# Altium PCB roneCPUBoard-v12.PcbDoc (part 3 of 3)
Units mil, origin at the board's own origin, x right, y up, seen from the top; angles counter-clockwise.
Board outline 3915.64 x 3915.87 mil, 2 copper layers (Top Layer, Bottom Layer); 205 components, 158 nets, 752 pads, 409 vias.
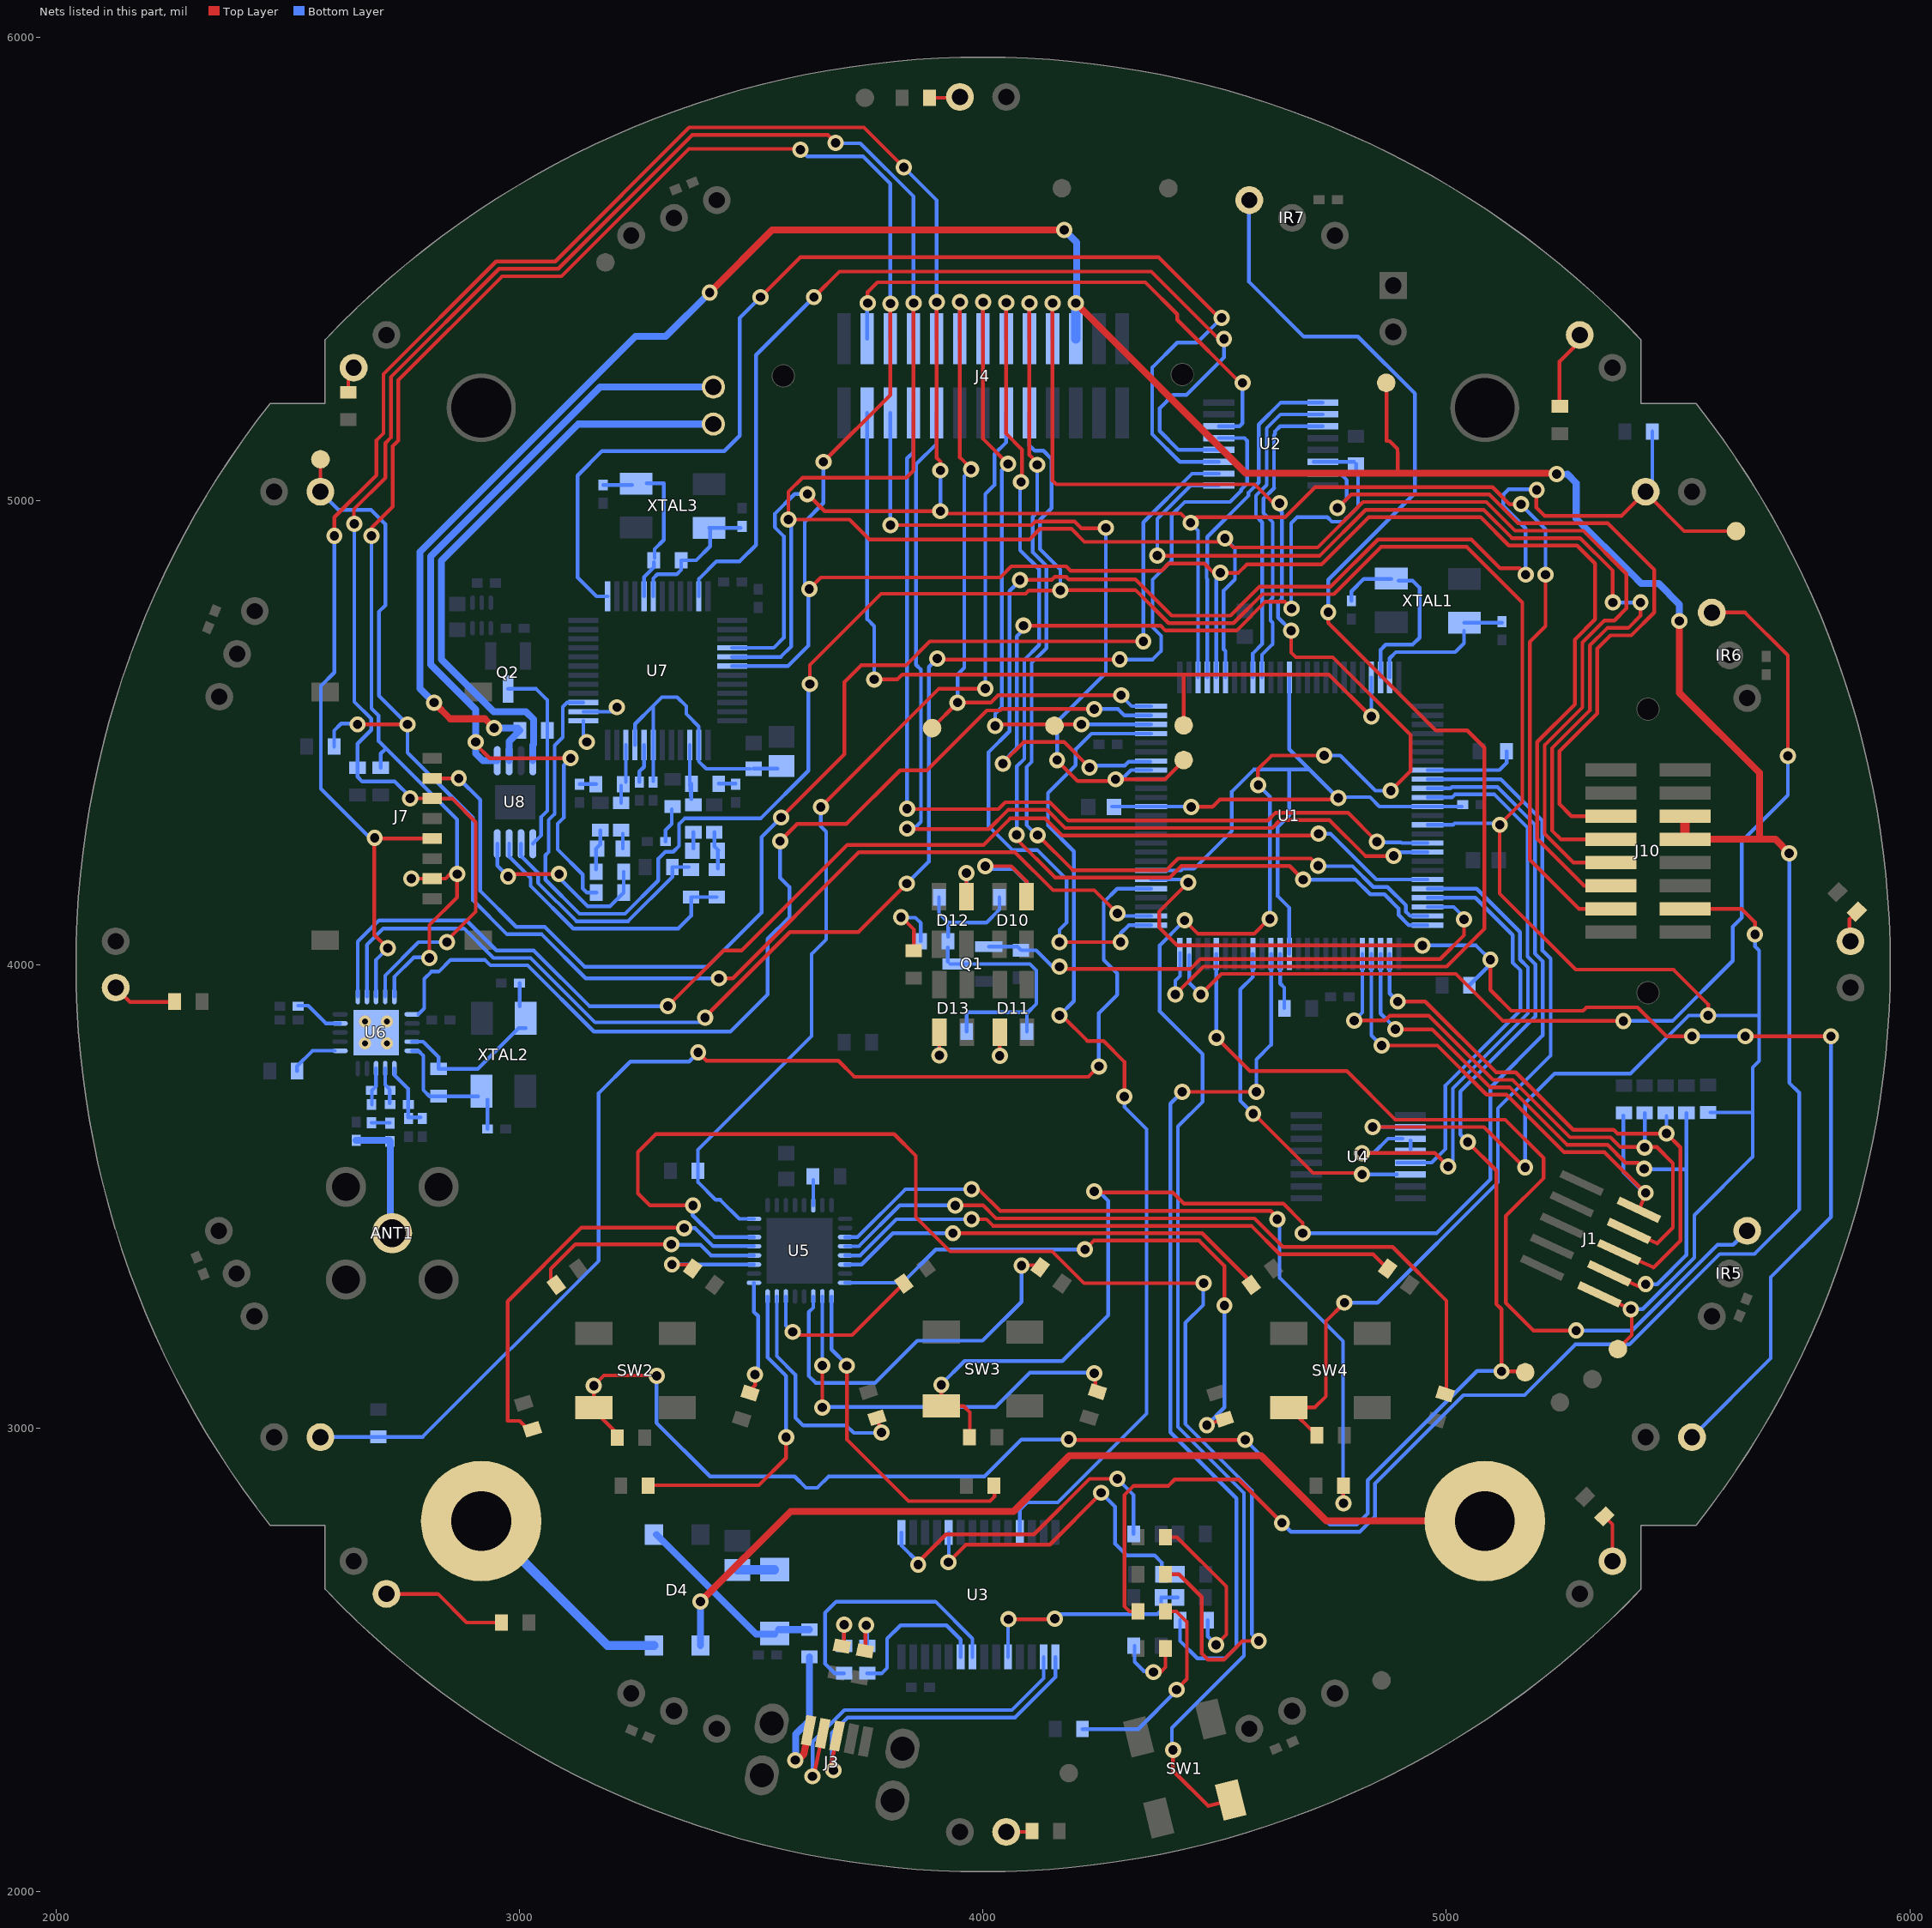
[diagram p3: the nets of this part, all layers, seen from the top]

## Via types
v1: diameter 35, hole 20, Top Layer to Bottom Layer, tented top, 392 vias
v2: diameter 25.98, hole 12.99, Top Layer to Bottom Layer, tented top, 17 vias

## Nets (pads, with @x,y where several pads share a name; then routed paths per layer and width w, separated by ;. In a path a pad name is that pad's centre, name@x,y a point inside that pad or via, vN(x,y) a via of type N, cw(c..) or ccw(c..) an arc to the next point about the centre after c; other vN are vias at no path point) (continued)
IR_RECV_5: IR5.1 U1.96 | length 1975.3
  Top Layer w8: v1(4504,3842) 4576,3770 4785,3770 4890,3665 5127,3665 5210,3582 5210,3539 5128,3457 5128,3270 5188,3210 v1(5280,3210)
  Bottom Layer w8: v1@4503.52,3842.48 U1.96@4503.52,4022.77 ; v1(5280,3210) 5400.25,3210 5585.25,3395 5618.88,3395 IR5.1@5649.27,3425.39
IR_RECV_6: IR6.1 U1.99 | length 2252.5
  Top Layer w8: v1(4470,3935) 4514.5,3979.5 5020.5,3979.5 5122,3878 v1@5374,3878 ; IR6.1@5572.73,4759.39 5644.61,4759.39 5737,4667 v1(5737,4450)
  Bottom Layer w8: U1.99@4445,4020 4445,3960 v1(4470,3935) ; v1@5390,3878 5488,3878 5618,4008 5618,4081.35 5637.5,4100.85 5637.5,4265.75 5737,4365.25 v1(5737,4450)
  other v1: 5382,3878
IR_RECV_7: IR7.1 U1.100 | length 2865.3
  Top Layer w8: v1(4415,3935) 4475.5,3995.5 5000.5,3995.5 5082,4077 5082,4468 5045,4505 4977.09,4505 4745,4737.09 v1(4745,4760)
  Bottom Layer w8: v1(4415,3935) 4415,3965 4425,3975 U1.100@4425,4025 ; IR7.1@4574,5648.66 4574,5473 4692,5355 4809,5355 4932,5232 4932,5017 4745,4830 v1(4745,4760)
IR_XMIT_CLK: U1.71 U4.11 U4.12 | length 1134
  Top Layer w8: v1(4818,3593) 4975,3593 v1(5004,3564)
  Bottom Layer w8: v1(4818,3593) 4843,3593 4874,3624 U4.11@4905,3624 ; U4.12@4923,3601.13 U4.11@4923,3620.32 ; U1.71@4959.23,4163.52 5065.48,4163.52 5159,4070 5159,4010.49 5176,3993.49 5176,3894.37 5014,3732.37 5014,3577 v1@5006,3569
IR_XMIT_DATA: U1.92 U4.14 | length 716.5
  Top Layer w8: v1@4587,3675 4712,3550 v1@4815,3550
  Bottom Layer w8: U1.92@4582.26,4022.77 4582.26,3973.26 4555,3946 4555,3706 v1(4583,3678) ; v1@4824.61,3546.61 U4.14@4893.66,3546.61
  other v1: 4818,3547
IR_XMIT_PWM: U1.72 U4.13 | length 868.6
  Bottom Layer w8: U4.13@4893.66,3572.2 U4.13@4922.2,3572.2 4968.2,3572.2 4998,3602 4998,3739 5144,3885 ; U1.72@4959.23,4143.83 5062.54,4143.83 5143,4063.37 5143,4003.86 5160,3986.86 5160,3901 5144.5,3885.5
JTAG_TCK: J1.4 R8.1 U1.80 | length 1287.5
  Top Layer w8: v1(4801,3879) 4867.28,3879 4877.78,3889.5 4962.13,3889.5 5100.63,3751 5142.88,3751 5266.88,3627 5354.25,3627 5375.25,3606 v1@5428,3606 ; J1.4@5394.03,3424.89 5455,3398 5489,3432 5489,3571 5454,3606 v1@5444,3606
  Bottom Layer w8: v1(4801,3879) 4818.48,3896.48 U1.80@4818.48,4022.77 ; v1(5428,3605) R8.1@5428,3679.47
JTAG_TDI: J1.8 R10.1 U1.78 | length 1422.4
  Top Layer w8: v1(4890,3860) 4969,3860 5094,3735 5136.25,3735 5260.25,3611 5347.63,3611 5386.63,3572 5414,3572 v1(5427,3559) ; J1.8@5351.43,3333.54 v1@5420,3303
  Bottom Layer w8: U1.78@4857.85,4022.77 4857.85,3894.15 v1@4890,3862 ; v1@5427,3558 5518,3558 ; v1(5430,3310) 5455,3310 5518,3373 5518,3558 ; R10.1@5518,3679.47 5518,3558
JTAG_TDO: J1.6 R9.1 U1.77 | length 1249.9
  Top Layer w8: v1(4895,3920) 4954.25,3920 5107.25,3767 5149.51,3767 5273.51,3643 5360.88,3643 5368.88,3635 v1@5472,3635 ; J1.6@5372.73,3379.22 5447,3346 5505,3404 5505,3605 v1(5475,3635)
  Bottom Layer w8: U1.77@4877.54,4022.77 4877.54,3937.46 v1(4895,3920) ; v1(5475,3635) R9.1@5475,3673
JTAG_TMS: J1.2 R7.1 U1.79 | length 1129.7
  Top Layer w8: v1(4860,3825) 4980.49,3825 5086.49,3719 5129.63,3719 5253.63,3595 5341,3595 v1@5429,3507 ; J1.2@5415.32,3470.56 v1@5430,3504
  Bottom Layer w8: U1.79@4838.17,4022.77 4838.17,3846.83 v1(4860,3825) ; R7.1@5382,3674 5382,3552 v1@5427,3507
  other v1: 5430,3507
LED_BLUE_0: D15.2 U5.3 | length 1688.7
  Top Layer w8: v1(3975,3515) 3990,3515 4037,3468 4621,3468 v1@4637,3452 ; v1@4777.53,2841.53 D15.2@4777.53,2869
  Bottom Layer w8: U5.3@3702.43,3411.53 3729.02,3411.53 3832.49,3515 v1(3975,3515) ; v1@4640,3438 4640,3324 4777,3187 v1@4777,2837.05
  other v1: 4778,2837 4635,3450
LED_BLUE_1: D16.2 U5.4 | length 1617.6
  Top Layer w8: v1(3940,3480) 4000,3480 4028,3452 4585.63,3452 4647.13,3390.5 4883.8,3390.5 5000,3274.3 D16.2@5000,3075.96
  Bottom Layer w8: U5.4@3702.43,3391.84 3731.96,3391.84 3820.12,3480 v1(3940,3480)
LED_BLUE_2: D17.2 U5.5 | length 1239.6
  Top Layer w8: v1(3975,3450) 4007.37,3450 4021.37,3436 4579,3436 4640.5,3374.5 4841.97,3374.5 D17.2@4873.11,3343.36
  Bottom Layer w8: U5.5@3702.43,3372.16 3734.9,3372.16 3812.75,3450 v1@3967.5,3450
LED_BLUE_3: D18.2 U5.6 | length 925.9
  Top Layer w8: v1@3947.63,3420 4473,3420 D18.2@4572,3321
  Bottom Layer w8: U5.6@3702.43,3352.47 3737.84,3352.47 3805.37,3420 v1(3935,3420)
LED_BLUE_4: D19.2 U5.8 | length 1277.9
  Top Layer w8: v1(4220,3385) 4239,3404 4466.37,3404 4521,3349.37 v1(4521,3264) ; v1@4483,3007 D19.2@4521.12,3018.92
  Bottom Layer w8: U5.8@3702.43,3313.1 3826.1,3313.1 3898,3385 v1(4220,3385) ; v1(4483,3006) 4521,3044 v1(4521,3264)
LED_GREEN_0: D20.2 U5.9 | length 720.5
  Top Layer w8: v1(3706,3134) 3706,2975 3839,2842 4015,2842 4025,2852 D20.2@4025,2874
  Bottom Layer w8: U5.9@3672.9,3283.57 3672.9,3169.1 v1@3706,3136
LED_GREEN_1: D21.2 U5.10 | length 895.1
  Top Layer w8: v1@3653,3045 v1@3653,3134.21 ; D21.2@4242.12,3079.08 v1@4242.12,3118
  Bottom Layer w8: v1@3653,3045 4027,3045 4101,3119 v1@4240,3119 ; v1(3653.21,3134.21) U5.10@3653.21,3283.57
  other v1: 3653,3044 4240,3118
LED_GREEN_2: D22.2 U5.11 | length 819.5
  Top Layer w8: v1@4084,3351 D22.2@4112,3351
  Bottom Layer w8: U5.11@3633.53,3283.57 3633.53,3259.32 3623.71,3249.5 3623.71,3112.29 3639,3097 3767,3097 3858,3188 3999,3188 4083,3272 v1(4083,3350)
LED_GREEN_3: D23.2 U5.14 | length 363.2
  Top Layer w8: v1@3595,3200 3717.47,3200 D23.2@3829.11,3311.64
  Bottom Layer w8: U5.14@3574.47,3283.57 3574.47,3220.53 v1@3588.5,3206.5
  other v1: 3589,3207
LED_GREEN_4: D24.2 U5.15 | length 510.5
  Top Layer w8: D24.2@3771,3021 v1(3781,2990)
  Bottom Layer w8: U5.15@3554.79,3283.57 3554.79,3154.84 3595,3114.63 3595,3022 3612,3005 3705,3005 3721,2989 v1@3781,2989
LED_HEARTBEAT: R5.2 U1.90 | length 1931.1
  Top Layer w8: v1(4430,3725) v1(4590,3725)
  Bottom Layer w8: R5.2@4425,2585 4425,2540 4462.5,2502.5 4522.5,2502.5 4547,2527 4547,2848 4404.5,2990.5 4404.5,3699.5 v1(4430,3725) ; v1(4590,3725) 4590,3795 4621.63,3826.63 U1.90@4621.63,4022.77
LED_IR_BEACON: Q1.1 R33.2 U1.73 | length 1202.7
  Top Layer w8: v1@4165,4000 4175,3990 4447.37,3990 4468.87,4011.5 4986.5,4011.5 5037.93,4062.93 v1(5037.93,4097.07)
  Bottom Layer w8: Q1.1@4012.43,4038.4 4074.13,4038.4 R33.2@4082,4030.53 4114.47,4030.53 4150,3995 v1(4165,3995) ; U1.73@4959.23,4124.15 5015.85,4124.15 v1@5040,4100
LED_MSP430: D26.2 U5.22 | length 3050.2
  Top Layer w8: v1(3374,3480) 3281,3480 3255,3506 3255,3595 3294,3634 3808,3634 3855,3587 3855,3455 3929.21,3380.79 4149.21,3380.79 4218,3312 v1(4476,3312) ; D26.2@4393.53,2684 4423,2684 4472,2635 4472,2513 4485,2500 4520,2500 4560,2540 v1(4595,2540)
  Bottom Layer w8: v1@3373,3477 3373,3459 3420.47,3411.53 U5.22@3505.57,3411.53 ; v1@4475,3306 4475,3265 4436.5,3226.5 4436.5,3008.5 4580,2865 4580,2555 v1(4595,2540)
LED_RED_0: D25.2 U5.16 | length 687
  Top Layer w8: D25.2@3277.53,2876 3516,2876 3575,2935 v1(3575,2980)
  Bottom Layer w8: U5.16@3535.1,3283.57 3535.1,3151.9 3575,3112 v1(3575,2980)
LED_RED_1: D27.2 U5.17 | length 238
  Top Layer w8: D27.2@3494.1,3078.1 3508,3092 v1(3508,3115)
  Bottom Layer w8: U5.17@3505.57,3313.1 3505.57,3250.15 3514.5,3241.22 v1@3514.5,3121.5
LED_RED_2: D28.2 U5.19 | length 213.3
  Top Layer w8: v1@3340.47,3352 3364.47,3352 D28.2@3373.11,3343.36
  Bottom Layer w8: v1(3328.53,3352.47) U5.19@3505.57,3352.47
LED_RED_3: D29.2 U5.20 | length 507.4
  Top Layer w8: D29.2@3079.11,3308.64 3067,3320.76 3067,3343 3120,3396 v1@3326,3396
  Bottom Layer w8: v1@3328,3395 3390,3395 3412.84,3372.16 U5.20@3505.57,3372.16
  other v1: 3327,3396
LED_RED_4: D30.2 U5.21 | length 929.1
  Top Layer w8: D30.2@3021,2994 3000,3015 2974,3015 2974,3273 3133,3432 v1@3357,3432
  Bottom Layer w8: v1(3355,3431) 3378.37,3431 3417.37,3392 U5.21@3505.42,3392
LED_RESET: J4.16 R34.1 U5.24 | length 2157.3
  Top Layer w8: v1(3650,4340) 3905,4595 v1(4005,4595)
  Bottom Layer w8: U5.24@3505.57,3450.9 3474.1,3450.9 3433,3492 3423,3492 3384.53,3530.47 R34.1@3384.53,3555 3384.53,3600 3630,3845.47 3630,4022.42 3661.5,4053.92 3661.5,4286.5 3650,4298 v1(3650,4340) ; v1(4005,4595) 4005,5015 4024.5,5034.5 4024.5,5101.22 4050,5126.72 J4.16@4050,5189.98
LEFT: R57.1 R58.1 U7.46 | length 116.9
  Bottom Layer w8: R58.1@3219,4348.53 R57.1@3219,4386 ; R57.1@3229.1,4394.1 U7.46@3229.1,4473.57
LEFT_OUT: C44.1 R53.1 R62.2 | length 86.5
  Bottom Layer w8: R53.1@3165,4205 C44.1@3165,4250 ; C44.1@3166.22,4251.22 3174,4259 R62.2@3174,4289.47
LIGHT_BL: R40.1 R41.1 U1.5 | length 2763.9
  Top Layer w8: v1(3385,3810) 3403,3792 3687.6,3792 3722.3,3757.3 4227.3,3757.3 v1(4250,3780)
  Bottom Layer w8: R41.1@2570,2980 R40.1@2695,2980 ; R40.1@2695,2980.47 2790.47,2980.47 3170.5,3360.5 3170.5,3722.22 3238.78,3790.5 3365.5,3790.5 v1(3385,3810) ; v1(4250,3780) 4250,3895 4289.5,3934.5 4289.5,3980.78 4260.5,4009.78 4260.5,4134.5 4289.52,4163.52 U1.5@4362.77,4163.52
LIGHT_BR: R42.1 R43.1 U1.6 | length 2842.3
  Top Layer w8: v1(4443,4177) 4380,4114 4380,4080 4419,4041 v1(4948,4041) ; v1(5095,4010) 5095,3945 5140,3900 5295,3900 5302.5,3907.5 5412.5,3907.5 5475,3845 v1(5530,3845) ; v1(5645,3845) v1(5830,3845)
  Bottom Layer w8: U1.6@4362.77,4183.2 v1@4436.8,4183.2 ; v1(4948,4041) 5064,4041 v1(5095,4010) ; R42.1@5049.53,3955 v1@5095,4000.47 ; R43.1@5530,2980 5700,3150 5700,3325 5830,3455 v1(5830,3845) ; v1(5530,3845) v1(5645,3845)
LIGHT_FL: R36.1 R37.1 T_FL1.1 U1.2 | length 3030.1
  Top Layer w8: R37.1@2570,5020 T_FL1.1@2570,5090 ; v1(2650,4518) v1(2758,4518) ; v1(3430,3970) 3460,3970 3732,4242 4069,4242 4151,4160 4240,4160 v1(4290,4110)
  Bottom Layer w8: R37.1@2570,5020 2609.06,4980.94 2679.06,4980.94 2710,4950 2710,4775 2696,4761 2696,4580 v1(2758,4518) 2758,4457 2899,4316 2899,4138.63 2972.63,4065 3047.63,4065 3142.63,3970 v1@3425,3970 ; R36.1@2599.53,4470 2599.53,4504.53 2615,4520 v1@2650,4520 ; v1@4295.54,4104.46 U1.2@4362.77,4104.46
LIGHT_FR: R38.1 R39.1 T_FR1.1 U1.1 | length 3305.8
  Top Layer w8: v1@4080,4830 4148.28,4830 4154.78,4836.5 4179.22,4836.5 4184.72,4831 4328.63,4831 4407.13,4752.5 4533.87,4752.5 4596.37,4815 4750.23,4815 4852.23,4917 5054,4917 5116,4855 5158,4855 v1@5171,4842 ; v1(4165,4048) v1(4297,4048) ; v1@5194,5024 5194,4986 5212,4968 5378,4968 5429,5019 5513,4935 T_FR1.1@5625,4935
  Bottom Layer w8: v1@4080,4829 4057,4806 4057,4503 4012,4458 4012,4298.28 4063.28,4247 4117,4247 4180,4184 4180,4090 4165,4075 v1(4165,4048) ; v1(4297,4048) 4297,4067 4314.78,4084.78 U1.1@4362.77,4084.78 ; 5148.78,4963.22 5171,4941 v1(5171,4841) ; 5148.78,4963.5 5123,4989.28 5123,5014 5134,5025 v1@5195,5025 ; R39.1@5430,5020 5444.53,5034.53 R38.1@5444.53,5150
  other v1: 4079.5,4829.5 5195,5024
MICN: U7.2 | length 76.4
  Bottom Layer w8: U7.2@3137.57,4545.42 3200.42,4545.42 v1(3210,4555)
MICP: U7.1 | length 48.8
  Bottom Layer w8: U7.1@3137.57,4525.73 3137.57,4487.43 v1(3145,4480)
MOT0_PWMA: J4.4 T_PWM1.1 U1.47 | length 1886
  Top Layer w8: v1(3765,4615) 3815,4615 3825.5,4625.5 4746.5,4625.5 v1@4836.5,4535.5 ; T_PWM1.1@4433,4516 4433,4623.5
  Bottom Layer w8: J4.4@3750,5189.98 3750,4745 3765,4730 v1(3765,4615) ; v1@4838.17,4535 U1.47@4838.17,4619.23
  other v1: 4838,4535
MOT0_PWMB: J4.6 T_PWM2.1 U1.18 | length 1639.5
  Top Layer w8: v1(3800,4948) 4105,4948 4113,4956 4197.35,4956 4212.35,4941 v1@4259,4941 ; v1@4160,4440 4204.5,4395.5 v1@4282,4395.5 ; v1(4286,4399.5) 4392.5,4399.5 T_PWM2.1@4433,4440
  Bottom Layer w8: v1(3800,4948) J4.6@3800,5189.98 ; v1(4160,4441) 4160,4524 4265,4629 v1@4265,4938 ; v1@4286.5,4400 4299.63,4400 4319.05,4419.43 U1.18@4362.77,4419.43
  other v1: 4265,4942
MOT1_PWMA: J4.8 U1.66 | length 2027.7
  Top Layer w8: v1@3837,4335 4033.03,4335 4048.03,4350 4144.25,4350 4183.75,4310.5 4614.5,4310.5 4631.5,4327.5 4787.5,4327.5 v1(4850,4265)
  Bottom Layer w8: v1@3836,4345 3836,5092 3850,5106 J4.8@3850,5189.98 ; v1@4851.5,4263.5 4901.5,4263.5 4903.06,4261.94 U1.66@4959.23,4261.94
  other v1: 3836,4336
MOT1_PWMB: J4.10 U1.67 | length 2113.8
  Top Layer w8: v1@3836,4292 4012.65,4292 4054.65,4334 4137.63,4334 4177.13,4294.5 4624.5,4294.5 4641.5,4311.5 4747.5,4311.5 4825,4234 v1(4886,4234)
  Bottom Layer w8: v1@3851,4293 3866,4308 3866,4636.19 3855.5,4646.69 3855.5,5079.5 3900,5124 J4.10@3900,5189.98 ; v1@4894.26,4242.26 U1.67@4959.23,4242.26
  other v1: 3836,4293
NetANT1_1: ANT1.1 C27.1 C28.2 | length 269.6
  Bottom Layer w15: C28.2@2647,3620.31 C27.1@2718.69,3620.31 ; ANT1.1@2721,3420.06 C27.1@2721,3618
NetC1_2: C1.2 U1.48 XTAL1.1 | length 431.6
  Bottom Layer w8: C1.2@4795,4784.69 4795,4805 4822,4832 XTAL1.1@4881.26,4832 ; U1.48@4857.85,4619.23 4857.85,4678.85 4869,4690 4927,4690 4942,4705 4942,4813 4927,4828 XTAL1.1@4897,4828
NetC2_2: C2.2 U1.49 XTAL1.3 | length 323.5
  Bottom Layer w8: U1.49@4877.54,4619.23 4877.54,4660.54 4891,4674 5019,4674 5038,4693 XTAL1.3@5038,4720 ; XTAL1.3@5038.74,4737.26 C2.2@5120,4737.26
NetC22_2: C22.2 R48.1 U6.9 XTAL2.1 | length 371
  Bottom Layer w8: U6.9@2767.76,3833.32 2791.68,3833.32 2825,3800 R48.1@2825,3774.53 2909.53,3774.53 2997.48,3862.48 XTAL2.1@3012.74,3862.48 ; XTAL2.1@2999.69,3909.69 C22.2@2999.69,3960
NetC23_2: C23.2 U6.19 | length 106.4
  Bottom Layer w8: C23.2@2521.69,3911 2543.37,3911 2581.69,3872.69 U6.19@2612.24,3872.69
NetC24_2: C24.2 R48.2 U6.10 XTAL2.3 | length 290.1
  Bottom Layer w8: U6.10@2767.76,3813.63 2781.37,3813.63 2792,3803 2792,3729 2805.53,3715.47 R48.2@2825,3715.47 XTAL2.3@2910.53,3715.47 ; C24.2@2930.31,3645 XTAL2.3@2930.31,3708.31
NetC25_2: C25.2 C26.2 L4.2 U6.11 | length 143.5
  Bottom Layer w8: U6.11@2729.37,3775.24 2729.37,3761.63 2759,3732 2759,3698 C25.2@2759,3670 ; C25.2@2760,3670 C26.2@2786,3670
NetC27_2: C27.2 L3.2 | length 40
  Bottom Layer w8: L3.2@2680,3658.31 C27.2@2720,3658.31
NetC29_1: C29.1 R49.2 U7.18 XTAL3.1 | length 304.3
  Bottom Layer w8: U7.18@3288.16,4794.43 3288.16,4833.16 3297,4842 3339,4842 3348.53,4851.53 R49.2@3348.53,4872 3381,4872 3411,4902 XTAL3.1@3411,4936 ; XTAL3.1@3408.74,4942.26 C29.1@3476.94,4942.26
NetC30_1: C30.1 R49.1 U7.17 XTAL3.3 | length 351.5
  Bottom Layer w8: C30.1@3180,5034.68 XTAL3.3@3242.68,5034.68 ; U7.17@3268.47,4794.43 3268.47,4836.1 3290,4857.63 R49.1@3290,4868 ; XTAL3.3@3274,5038 3311,5038 3311,4916 3291,4896 R49.1@3291,4877
NetC37_2: C37.2 U7.44 | length 84.2
  Bottom Layer w8: C37.2@3258,4393.69 3258,4416 3268.47,4426.47 U7.44@3268.47,4473.57
NetC38_1: C38.1 R54.2 | length 75
  Bottom Layer w8: C38.1@3314.69,4265 3314.69,4289.69 3328,4303 R54.2@3328,4334.47
NetC39_1: C39.1 R55.2 | length 36.5
  Bottom Layer w8: R55.2@3429.53,4390 C39.1@3466,4390
NetC40_1: C40.1 R57.2 | length 35.5
  Bottom Layer w8: C40.1@3129,4389 R57.2@3164.47,4389
NetC41_2: C41.2 R56.2 U8.2 | length 519.5
  Bottom Layer w8: U8.2@3002.8,4260.43 3002.8,4234.46 3039.5,4197.75 3039.5,4176.15 3122.37,4093.28 3233.91,4093.28 3329.53,4188.91 C41.2@3329.53,4210 R56.2@3364.53,4210
NetC43_2: C43.2 R59.2 | length 35.5
  Bottom Layer w8: C43.2@3375,4250 R59.2@3375,4285.47
NetC44_2: C44.2 R58.2 | length 32.4
  Bottom Layer w8: C44.2@3222.56,4250 R58.2@3222.56,4282.44
NetD1_2: D1.2 R5.1 | length 370.6
  Top Layer w8: D1.2@4393.53,2764 4418.37,2764 4525,2657.37 4525,2554 v1(4503,2532)
  Bottom Layer w8: R5.1@4485,2585 4485,2550 v1(4503,2532)
NetD2_2: D2.2 R13.2 | length 438.1
  Top Layer w8: D2.2@4393.53,2604 4417,2604 4440,2581 4440,2458 v1@4425,2443
  Bottom Layer w8: R13.2@4214.53,2350 4335,2350 v1@4418,2433
  other v1: 4418,2435
NetD3_2: D3.2 R12.2 | length 152.7
  Top Layer w8: v1(4368.02,2473.02) 4383.02,2473.02 4393.53,2483.53 D3.2@4393.53,2524
  Bottom Layer w8: R12.2@4327,2530 4327,2495 4347,2475 v1@4366.03,2475
NetD4_1: D4.1 F1.2 R14.2 | length 410.2
  Bottom Layer w15: D4.1@3295.32,2769.68 3510,2555 F1.2@3550,2555 ; F1.2@3558.43,2564.53 R14.2@3625,2564.53
NetD5_2: D5.2 R15.2 U3.19 | length 480.6
  Top Layer w8: v1(4055,2587) v1@4155,2587
  Bottom Layer w8: U3.19@4053.98,2505.55 v1@4053.98,2585.98 ; v1(4155,2588) 4165,2598 4376,2598 4384.53,2606.53 R15.2@4384.53,2634 ; R15.2@4385,2634 D5.2@4420.47,2634
NetD6_1: D6.1 U3.1 | length 717.6
  Top Layer w8: v1@3860,2710 3920,2770 4110,2770 4230,2890 v1(4290,2890)
  Bottom Layer w8: U3.1@3823.66,2774.45 3823.66,2746.34 v1@3860,2710 ; v1(4290,2890) 4325,2855 D6.1@4325,2771
  other v1: 3860,2705
NetD7_2: D7.2 R18.2 U3.5 | length 734.1
  Top Layer w8: v1@3934,2719 3963,2748 4144,2748 v1@4255,2859
  Bottom Layer w8: v1@3926.02,2718.98 U3.5@3926.02,2774.45 ; v1(4255,2860) 4285,2830 4285,2750 4310,2725 4370,2725 4385.53,2709.47 R18.2@4385.53,2684 ; R18.2@4387,2684 D7.2@4421.47,2684
  other v1: 3925,2710
NetD8_2: D8.2 R16.2 | length 96.5
  Top Layer w8: D8.2@3746,2519 v1@3746,2574
  Bottom Layer w8: R16.2@3750,2529.53 v1@3750,2571
  other v1: 3748,2574
NetD9_2: D9.2 R17.2 | length 87.5
  Top Layer w8: D9.2@3700,2533 v1(3700,2575)
  Bottom Layer w8: R17.2@3700,2529.53 v1(3700,2575)
NetD10_3: D10.3 R29.2 | length 252.5
  Top Layer w8: v1@4015,4212 4061,4212 4094.06,4178.94 D10.3@4094.06,4146.18
  Bottom Layer w8: v1@4010,4206 4066,4206 4095,4177 R29.2@4095,4147
  other v1: 4005,4212
NetD11_3: D11.3 R30.2 | length 102.8
  Top Layer w8: v1@4035.94,3803 D11.3@4035.94,3853.82
  Bottom Layer w8: v1@4035.47,3803 R30.2@4035.47,3855
  other v1: 4036,3803
NetD12_3: D12.3 R31.2 | length 99.8
  Top Layer w8: D12.3@3964.06,4146.18 v1@3964.06,4193.94
  Bottom Layer w8: R31.2@3964.53,4145 v1@3964.53,4197
  other v1: 3964,4197
NetD13_3: D13.3 R28.2 | length 100.8
  Top Layer w8: v1@3905.94,3804 D13.3@3905.94,3853.82
  Bottom Layer w8: v1@3905.47,3804 R28.2@3905.47,3855
  other v1: 3906,3804
NetD14_2: D14.2 R32.2 | length 168.6
  Top Layer w8: v1@3823.5,4102.5 3851,4075 D14.2@3851,4032
  Bottom Layer w8: v1@3823,4101 3854,4101 3865.47,4089.53 R32.2@3865.47,4050
  other v1: 3823,4102
NetF1_1: F1.1 L1.1 | length 80
  Bottom Layer w20: L1.1@3470,2693.5 F1.1@3550,2693.5
NetJ3_1: J3.1 R14.1 | length 299.4
  Top Layer w15: v1@3601,2284 3613,2296 J3.1@3623.14,2346.91
  Bottom Layer w15: v1@3596,2287 3596,2339.04 3625,2368.04 R14.1@3625,2505.47
  other v1: 3595,2283
NetJ11_1: J11.1 R60.1 U8.5 | length 1845.7
  Top Layer w8: v1@2905,4475 2935,4445 v1(3110,4445)
  Bottom Layer w8: v1(3110,4445) 3095.03,4430.03 3095.03,4316.7 3082,4303.67 3082,4248 3136.19,4193.81 3136.19,4163.81 3145,4155 R60.1@3165.47,4155
  Bottom Layer w15: U8.5@2951.61,4439.57 2920.43,4439.57 2905,4455 v1(2905,4480) 2905,4550 2808,4647 2808,4880.53 3173.47,5246 J11.1@3418,5246
NetJ11_2: J11.2 U8.8 | length 1264.5
  Bottom Layer w15: U8.8@3028.39,4439.57 3028.39,4473.39 3029.75,4474.75 3029.75,4529.14 3013.6,4545.29 2943.62,4545.29 2831,4657.91 2831,4871 3126,5166 J11.2@3418,5166
NetL2_1: L2.1 L4.1 U6.12 | length 75.8
  Bottom Layer w8: U6.12@2709.68,3775.24 2709.68,3740.32 L2.1@2719,3731 ; L4.1@2719.68,3700.32 L2.1@2719.68,3728
NetL2_2: L2.2 L3.1 U6.13 | length 81.3
  Bottom Layer w8: L3.1@2681,3697.69 2681,3728 2690,3737 U6.13@2690,3775.24
NetQ1_3: Q1.3 R28.1 R29.1 R30.1 R31.1 R32.1 | length 779.6
  Bottom Layer w8: R31.1@3905,4145 3905,4110 3925,4090 ; Q1.3@3924,4006 R32.1@3924,4037 ; R32.1@3925,4059.53 3925,4090 ; Q1.3@3929,4001 Q1.3@3941.57,4001 4100.94,4001 4115,3986.94 4115,3915 4095,3895 ; R28.1@3964.53,3855 3964.53,3897 4094.53,3897 R30.1@4094.53,3855 ; R29.1@4035.47,4145 4035.47,4118.47 4007,4090 3925,4090
NetQ2_3: Q2.3 R51.1 U8.1 | length 417.4
  Bottom Layer w8: Q2.3@2975,4594.57 3035.43,4594.57 3059.53,4570.47 R51.1@3059.53,4505 3059.53,4331.4 3046.5,4318.37 3046.5,4278.55 U8.1@3028.39,4260.43
NetR3_1: R3.1 U1.58 | length 202.2
  Bottom Layer w8: U1.58@4959.23,4419.43 5114.43,4419.43 5130,4435 R3.1@5130,4460
NetR4_2: R4.2 U1.89 | length 120.9
  Bottom Layer w8: U1.89@4641.31,4022.77 4641.31,3958.68 4650,3950 R4.2@4650,3905.47
NetR16_1: R16.1 U3.23 | length 331.9
  Bottom Layer w8: R16.1@3750,2470.47 3781.47,2470.47 3793,2482 3793,2545 3822,2574 3921,2574 3951.61,2543.39 U3.23@3951.61,2505.55
NetR17_1: R17.1 U3.22 | length 560.2
  Bottom Layer w8: R17.1@3700,2470.47 3679.53,2470.47 3659,2491 3659,2601 3683,2625 3897.2,2625 3977.2,2545 U3.22@3977.2,2505.55
NetR20_1: R20.1 T0.1 | length 76.5
  Top Layer w8: R20.1@3884.53,5870 3950,5870 T0.1@3961,5870
NetR21_1: R21.1 T1.1 | length 42.5
  Top Layer w8: R21.1@2630,5234.53 T1.1@2630,5277
NetR22_1: R22.1 T2.1 | length 139.3
  Top Layer w8: T2.1@2128,3950 2159.01,3918.99 R22.1@2254.46,3918.99
NetR23_1: R23.1 T3.1 | length 273.6
  Top Layer w8: T3.1@2712.36,2641.64 2823.36,2641.64 2885,2580 R23.1@2960.47,2580
NetR24_1: R24.1 T4.1 | length 53.5
  Top Layer w8: T4.1@4050,2128 R24.1@4103.47,2128
NetR25_1: R25.1 T5.1 | length 104
  Top Layer w8: R25.1@5340.88,2809.12 5358.36,2791.64 T5.1@5358.36,2712.36
NetR26_1: R26.1 T6.1 | length 68.7
  Top Layer w8: T6.1@5870,4052 5870,4098.24 R26.1@5885.88,4114.12
NetR27_1: R27.1 T7.1 | length 156.1
  Top Layer w8: R27.1@5244.12,5205.41 5244.12,5300.88 T7.1@5287,5343.76
NetR35_2: R35.2 U5.30 | length 54.1
  Bottom Layer w8: U5.30@3633.53,3480.43 R35.2@3633.53,3534.53
NetR47_2: R47.2 U6.16 | length 105.9
  Bottom Layer w8: R47.2@2519.53,3770 2519.53,3780.53 2553,3814 U6.16@2601,3814
NetR52_2: R52.2 R56.1 U8.3 | length 601.7
  Bottom Layer w8: U8.3@2977.2,4260.43 2977.2,4232.8 3023.5,4186.5 3023.5,4169.53 3115.74,4077.28 3342.28,4077.28 3370,4105 R56.1@3370,4145.47 R52.2@3425,4145.47
NetR53_2: R53.2 R60.2 U8.4 | length 407.5
  Top Layer w8: v1@2980,4195 v1(3085,4195)
  Bottom Layer w8: U8.4@2951.61,4260.43 2951.61,4213.39 v1(2975,4190) ; v1@3085,4187.01 3146.72,4125.28 3194.81,4125.28 R60.2@3224.53,4155 R53.2@3224.53,4200
POWER_BUTTON: J4.19 SW1.3 | length 4820.2
  Top Layer w8: v1(4150,5427) 4150,5044 4158,5036 4586,5036 v1@4623,4999 ; v1(4410,2305) 4410,2260 4486,2184 SW1.3@4534,2196 ; v1@4442,4088 4464,4066 4585,4066 v1@4617,4098 ; v1@4593,4387 4593,4421 4623,4451 v1(4736,4451) ; v1(4665,4720) 4665,4673 4675,4663 4754.75,4663 4923,4494.75 4923,4418 v1@4881,4376
  Bottom Layer w8: J4.19@4150,5350.02 v1(4150,5427) ; v1@4407.5,2307.5 4407.5,2352.5 4563,2508 4563,2859.37 4420.5,3001.87 4420.5,3650.5 4474,3704 4474,3806 4381,3899 4381,4041 v1@4432.5,4092.5 ; v1(4594,4387) 4619,4362 v1@4619,4100 ; v1@4625,4996 4626,4995 v1(4640,4995) ; v1@4634.5,4986.5 4645,4976 4645,4788.72 4636.5,4780.22 4636.5,4748.5 v1(4665,4720) ; v1(4736,4451) 4771,4451 4847,4375 v1(4880,4375)
  other v1: 4435,4095 4619,4098
PRONG1: D4.3 J2.1 | length 481.5
  Bottom Layer w20: J2.1@2920,2800 3189.68,2530.32 D4.3@3289.8,2530.32
PRONG2: D4.4 J5.1 | length 1976.6
  Top Layer w15: v1(3390,2625) 3585,2820 4066,2820 4186,2940 4600,2940 4741,2799 J5.1@5083,2799
  Bottom Layer w15: v1(3390,2625) 3390,2530.51 D4.4@3390.2,2530.32
QEI_0A: J4.11 T_QEI1.1 U1.25 | length 1478.8
  Top Layer w8: T_QEI1.1@3890,4510 v1(3945,4565) 4016.72,4565 4032.72,4581 v1(4298,4581) ; v1(3950,5429) 3950,5094 v1@3974,5070
  Bottom Layer w8: v1(3945,4565) 3945,4625.5 3959.5,4640 3959.5,5053.5 v1(3974,5068) ; J4.11@3950,5350.02 v1(3950,5429) ; v1@4295,4583 4320.78,4557.22 U1.25@4362.77,4557.22
QEI_0B: J4.13 T_QEI2.1 U1.23 | length 1354.6
  Top Layer w8: v1(4000,5429) 4000,5134 v1(4054,5080) ; v1@4030,4518 v1(4212,4518)
  Bottom Layer w8: J4.13@4000,5350.02 v1(4000,5429) ; v1@4026,4519 4026,4541 4040.5,4555.5 4040.5,5066.5 v1(4054,5080) ; v1@4213.15,4517.85 U1.23@4362.77,4517.85
  other v1: 4026,4515
QEI_1A: J4.15 U1.75 | length 2244.3
  Top Layer w8: v1(4050,5428) 4050,5145 4084,5111 4084,5067.28 v1@4084,5054 ; v1@4072.5,4270.5 4155.5,4187.5 4402.78,4187.5 4427.78,4212.5 4661.5,4212.5 v1(4691,4183)
  Bottom Layer w8: J4.15@4050,5350.02 v1(4050,5428) ; v1@4073,4289 4073,4427.63 4089,4443.63 4089,4657.2 4121,4689.2 4121,4853 4080,4894 v1@4080,5038 ; v1(4691,4183) 4803.75,4183 4835.54,4151.2 4866.17,4151.2 4896.78,4120.59 4896.78,4106.84 4918.84,4084.78 U1.75@4959.23,4084.78
  other v1: 4072.5,4279.5 4082,5041
QEI_1B: J4.17 U1.74 | length 2210.2
  Top Layer w8: v1(4100,5427) 4100,5099.35 v1@4114,5085.35 ; v1(4118,4279) 4193.5,4203.5 4396.15,4203.5 4421.15,4228.5 4707.5,4228.5 v1(4723,4213)
  Bottom Layer w8: J4.17@4100,5350.02 v1(4100,5427) ; v1@4117,4278 4094,4301 4094,4426 4105,4437 4105,4650.58 4137,4682.58 4137,4859.63 4107,4889.63 4107,4966 4117,4976 v1(4117,5078) ; v1@4723,4212 4797.37,4212 4842.17,4167.2 4872.8,4167.2 4912.78,4127.22 4912.78,4113.47 4921.79,4104.46 U1.74@4959.23,4104.46
RADIO_CE: U1.70 U6.1 | length 2733.9
  Top Layer w8: v1(3320,3910) 3440,4030 3479,4030 3707,4258 4001.28,4258 4058.28,4315 4134,4315 4171,4278 v1@4711,4278
  Bottom Layer w8: U6.1@2650.63,3930.76 2650.63,4049.63 2696,4095 2885,4095 2950,4030 3030.25,4030 3150.25,3910 v1(3320,3910) ; v1(4724,4282) 4750,4282 4848.8,4183.2 U1.70@4959.23,4183.2
RADIO_IRQ: U1.24 U6.6 | length 2220.7
  Top Layer w8: v1(3562,4266) 3599,4303 3705,4303 3821,4419 3879,4419 4008,4548 4037,4548 4040,4551 v1(4240,4551)
  Bottom Layer w8: U6.6@2781,3892 2794,3905 2794,3969 2809.5,3984.5 2825.22,3984.5 2850.72,4010 2924.75,4010 2936.75,3998 3017,3998 3160,3855 3454.69,3855 3535,3935.31 3535,4055 3582,4102 3582,4167 3562,4187 v1(3562,4266) ; v1(4240,4551) 4291.54,4551 4305,4537.54 U1.24@4362.77,4537.54
RADIO_THERM: U6.21
  other v2: 2666.38,3829.38 2713.62,3829.38 2666.38,3876.62 2713.62,3876.62
RESET: J1.10 J4.18 J10.3 R11.1 T_RST1.1 U1.64 U4.10 U7.3 | length 7574.2
  Top Layer w8: v1(3626.25,4605) 3626.25,4646.25 3780,4800 4091.72,4800 4098.72,4807 v1(4167,4807) ; v1@4174,4808 4329,4808 4400.5,4736.5 4540.5,4736.5 4603,4799 4756.86,4799 4858.86,4901 5044,4901 5164,4781 5164,4351 v1@5115,4302 ; v1(4841,3649) 5081,3649 v1@5168,3562 ; v1@5115,4301 5115,4153 5279,3989 5490,3989 5565,3914 v1(5565,3890) ; J1.10@5330.13,3287.87 v1(5398,3256) ; T_RST1.1@5370,3170 5400,3200 v1@5400,3253 ; J10.3@5538,4120 5637,4120 5666,4091 v1@5666,4066
  Bottom Layer w8: U7.3@3137.57,4565.1 3102.09,4565.1 3093.09,4556.1 3093.09,4490.09 3075.53,4472.53 3075.53,4324.77 3062.5,4311.75 3062.5,4242.5 3055.5,4235.5 3055.5,4182.78 3129,4109.28 3227.28,4109.28 3299,4181 3299,4227.94 3314.22,4243.16 3331.47,4243.16 3344,4255.69 3344,4302.94 3356.06,4315 3520,4315 3623,4418 v1@3623,4601.75 ; J4.18@4100,5189.98 4100,5120 4111.5,5108.5 4130.22,5108.5 4148,5090.72 4148,4984.37 4123,4959.37 4123,4896.25 4167,4852.25 v1@4167,4819 ; v1(4841,3649) U4.10@4923,3649 ; U4.10@4893.66,3648.98 U4.10@4947.02,3648.98 ; U1.64@4959.23,4301.31 5014.59,4301.31 5017.78,4304.5 v1@5112.13,4304.5 ; v1@5170,3564 5170,3700.72 5233.59,3764.31 5397.31,3764.31 5523,3890 v1(5565,3890) ; v1(5398,3256) 5423.63,3256 5535,3367.37 5535,3459 5661,3585 5661,3680.47 ; v1@5566,3890 5670,3890 ; R11.1@5570,3680.47 5661,3680.47 ; v1(5666,4065) 5666,4039 5675,4030 5675,3791.56 5661,3777.56 5661,3680.47
  other v1: 5170,3562 5115.31,4301.31
RIGHT: R55.1 R59.1 U7.39 | length 145.3
  Bottom Layer w8: R55.1@3366.9,4395.1 U7.39@3366.9,4473.57 ; R55.1@3367.4,4389.72 3370.47,4356.53 R55.1@3370.47,4390
RIGHT_OUT: C43.1 R52.1 R61.2 | length 80.8
  Bottom Layer w8: R61.2@3420,4285.47 3420,4255 C43.1@3428.78,4246.22 ; R52.1@3427.56,4207.09 C43.1@3427.56,4245
SPI_CLK: J4.9 J7.5 J10.4 U1.28 U6.3 U7.28 | length 7256.7
  Top Layer w8: v1(2600,4925) 2600,4965 2691,5056 2691,5131.25 2706,5146.25 2706,5274 2949,5517 3076.75,5517 3365.75,5806 3742.72,5806 v1(3828.72,5720) ; v1@2686,4271 2686,4064 v1(2715,4035) ; v1@2687,4272 J7.5@2809,4272 ; v1(3621,5015) 3658,4978 v1(3908,4978) ; v1(3900,5429) 3900,5093 3908,5085 v1(3908,5066) ; v1@3913,4973 4427,4973 v1@4448,4952 ; v1(4448,4953) 4460,4965 4651.72,4965 4716.72,5030 5099.39,5030 5136.39,4993 v1@5159.5,4993 ; v1(5214,4841) 5214,4730 5180,4696 5180,4226 5286,4120 J10.4@5354.98,4120
  Bottom Layer w8: v1(2600,4925) 2600,4630 2571,4601 2571,4379 v1@2677,4273 ; U6.3@2690,3930.76 2690,4010 v1(2715,4035) ; U7.28@3458.43,4683.21 3548.21,4683.21 3570,4705 3570,4924.04 3550.5,4943.54 3550.5,4972.22 3593.28,5015 v1(3621,5015) ; v1(3828.72,5720) 3900,5648.72 v1(3900,5429) J4.9@3900,5350.02 ; v1@3908,4989 v1(3908,5066) ; v1@4447,4953 4464,4936 4464,4737.7 ; U1.28@4464.15,4619.23 4464.15,4736.85 ; v1@5161,4992 5214,4939 v1(5214,4841)
  other v1: 2687,4273 5161,4993
SPI_MISO: J4.5 J7.7 J10.6 R2.1 U1.30 U6.5 U7.30 | length 7198.3
  Top Layer w8: v1(2680,4925) 2680,4942 2726,4988 2726,5118.37 2738,5130.37 2738,5260.75 2962.25,5485 3090,5485 3365,5760 3595,5760 v1@3605,5750 ; v1(2766,4185) J7.7@2811.02,4184.96 2840,4185 2850,4195 v1(2865,4195) 2865,4145 2805,4085 v1(2805,4014) ; v1(3625,4810) 3650,4835 4037,4835 4061,4859 4091.72,4859 4179.35,4859 4188.85,4849.5 4385.22,4849.5 4400.72,4865 4477.37,4865 4497.37,4845 v1(4512,4845) ; v1(3655.5,5084.5) 3800,5229 v1(3800,5426) ; v1@4500,4842 v1@4512,4842 ; v1@4516,4845 4551,4845 4569,4863 4730.35,4863 4832.35,4965 5073.88,4965 5134.88,4904 5281.97,4904 5321,4864.97 5321,4744.88 5277.5,4701.38 5277.5,4561.38 5196,4479.88 5196,4271 5297,4170 J10.6@5354.98,4170
  Bottom Layer w8: v1(2680,4925) 2680,4552.35 2695.5,4536.85 2695.5,4482.13 2865,4312.63 v1(2865,4195) ; R2.1@2700,4424.53 2700,4455 2710,4465 ; U6.5@2729.37,3930.76 2729.37,3973.12 2771.25,4015 v1@2803,4015 ; U7.30@3458.43,4643.84 3578.84,4643.84 3623,4688 v1@3623,4808 ; v1(3606,5758) 3620.5,5743.5 3740.87,5743.5 3800,5684.37 v1(3800,5426) J4.5@3800,5350.02 ; v1(3625,4810) 3615.07,4819.93 3615.07,4955.07 3655.5,4995.5 v1(3655.5,5084.5) ; U1.30@4503.28,4619.46 4503.28,4832.28 v1@4514,4843
SPI_MOSI: J4.7 J7.3 J10.8 R1.1 U1.31 U6.4 U7.29 | length 7613.4
  Top Layer w8: v1@2642,4952 2642,4982 2710,5050 2710,5125 2722,5137 2722,5267.37 2955.63,5501 3083.37,5501 3372.37,5790 3665,5790 v1(3682,5773) ; v1(2763.19,4358.19) J7.3@2811.02,4358.19 ; J7.3@2812,4358 2854,4358 2905,4307 2905,4113.82 v1@2843,4051.82 ; v1(3850,5427) 3850,5066 3834,5050 3610,5050 3580,5020 v1(3580,4960) 3712,4960 3755,4917 4100,4917 4123,4940 4190.72,4940 4218.72,4912 v1@4520,4912 ; v1@4525,4915 4540,4900 4722.09,4900 4820.09,4998 5086.14,4998 5148.14,4936 5295.23,4936 5388.5,4842.73 5388.5,4768.13 5362.37,4742 5340.75,4742 5293.5,4694.75 5293.5,4554.75 5212,4473.25 5212,4282 5274,4220 J10.8@5354.98,4220
  Bottom Layer w8: v1(2643,4951) 2643,4566.72 2679.5,4530.22 2679.5,4505.78 2650,4476.28 R1.1@2650,4425 ; R1.1@2650,4424.53 2650,4405 2660,4395 2730,4395 v1@2765,4360 ; U6.4@2709.68,3930.76 2709.68,3976.06 2781.63,4048 v1(2843,4048) ; U7.29@3458.43,4663.53 3563.53,4663.53 3586,4686 v1@3586,4954 ; v1@3685,5772 3735,5772 3850,5657 v1(3850,5427) J4.7@3850,5350.02 ; v1(4522,4919) 4543.5,4897.5 4543.5,4830.78 4519.28,4806.56 4519.28,4680.09 4523.2,4676.17 U1.31@4523.2,4619.23
SPI_SEL_A: U1.29 U2.1 | length 751.7
  Bottom Layer w8: U1.29@4481.86,4621.2 U1.29@4482.5,4620.56 ; U1.29@4483.83,4619.23 4483.83,4831.45 4482.5,4832.78 4482.5,4857.22 4483.83,4858.55 4483.83,4922.55 4573,5011.72 4573,5018.25 4595,5040.25 4595,5165 4642.57,5212.57 U2.1@4733.2,5212.57
SPI_SEL_AUDIO_SCI: U2.12 U7.23 | length 2160.3
  Top Layer w8: v1(3635,5440) 3690,5495 4363,5495 v1@4514,5344
  Bottom Layer w8: U7.23@3386.58,4794.43 3386.58,4831.58 3425,4870 3475,4870 3510,4905 3510,5315 v1(3635,5440) ; U2.12@4508.8,5110.2 4421.8,5110.2 4420,5112 4381,5151 4381,5200 4410,5229 4439,5229 4520,5310 v1(4520,5350)
SPI_SEL_AUDIO_SDI: U2.11 U7.13 | length 2594.7
  Top Layer w8: v1(3520,5440) 3606,5526 4379,5526 v1@4512.5,5392.5
  Bottom Layer w8: U7.13@3189.73,4794.43 3165.57,4794.43 3125,4835 3125,5055 3177.5,5107.5 3441.54,5107.5 3475,5140.96 3475,5395 v1(3520,5440) ; U2.11@4508.8,5084.61 4424.76,5084.61 4365,5144.37 4365,5288 4419,5342 4462,5342 v1(4515,5395)
SPI_SEL_B: U1.34 U2.2 | length 694.9
  Bottom Layer w8: U1.34@4582.26,4619.23 4582.26,4671.26 4602.5,4691.5 4602.5,4954.15 4589,4967.65 4589,5011.63 4612,5034.63 4612,5157 4641.98,5186.98 U2.2@4733.2,5186.98
SPI_SEL_C: U1.35 U2.3 | length 670.8
  Bottom Layer w8: U1.35@4601.94,4619.23 4601.94,4668.32 4625,4691.37 4625,4737.37 4620.5,4741.87 4620.5,4786.85 4625,4791.35 4625,4954.28 4605,4974.28 4605,5005 4628.19,5028.19 4628,5028.37 4628,5142.42 4630,5144.42 4630,5150 4641.39,5161.39 U2.3@4733.2,5161.39
SPI_SEL_EXPAND0: J10.10 U2.9 | length 2172.4
  Top Layer w8: v1@4385,4882 4726.72,4882 4825.72,4981 5080.51,4981 5141.51,4920 5288.6,4920 5359,4849.6 v1(5359,4781) ; J10.10@5354.98,4270 5247,4270 5228,4289 5228,4466.63 5309.5,4548.13 5309.5,4688.13 5347.37,4726 5392.37,4726 5419,4752.63 v1(5419,4781)
  Bottom Layer w8: v1(4376,4882) 4376,4961.37 4448.06,5033.43 U2.9@4508.8,5033.43 ; v1(5359,4781) v1(5419,4781)
SPI_SEL_EXPAND1: J10.12 U2.7 | length 1636.9
  Top Layer w8: v1(4765,4985) v1@4765,4995 ; v1@4775.37,4995 4794.37,5014 5092.76,5014 5154.76,4952 5348,4952 5448.5,4851.5 5448.5,4759.5 5399,4710 5354,4710 5325.5,4681.5 5325.5,4541.5 5244,4460 5244,4346 5270,4320 J10.12@5354.98,4320
  Bottom Layer w8: U2.7@4719.18,5060 4770,5060 4785,5045 4785,5005 v1(4765,4985)
SPI_SEL_MSP430: J4.3 U2.14 | length 1155.2
  Top Layer w8: v1(3751,5427) 3751,5451 3772,5472 4350,5472 4419,5403 4419,5391 v1@4557.5,5252.5
  Bottom Layer w8: J4.3@3750,5350.02 v1@3750,5427 ; U2.14@4508.8,5161.39 4553.61,5161.39 4560,5167.77 v1(4560,5255)
SPI_SEL_OE: R6.2 U1.19 U2.6 | length 1813.2
  Top Layer w8: v1@4043,4435 4088,4480 4175,4480 v1(4230,4425) ; v1@4090,4731 4383.37,4731 4393.87,4720.5 4547.13,4720.5 4609.63,4783 4651,4783 v1(4666,4768)
  Bottom Layer w8: v1@4043,4437 4073,4467 4073,4708 v1@4087,4722 ; v1@4229,4429 4306,4429 4314.33,4437.33 U1.19@4360.99,4437.33 ; v1@4665,4768 4665,4952 4678,4965 4743.28,4965 4752.78,4955.5 4777.22,4955.5 4786.72,4965 4787.09,4965 4809.5,4987.41 4809.5,5055.5 4805,5060 R6.2@4805,5080.47 ; U2.6@4713.2,5084.61 R6.2@4800.86,5084.61
  other v1: 4043,4433 4087,4731
SPI_SEL_RADIO: U2.13 U6.2 | length 3143.1
  Top Layer w8: v1@3400,3886.72 3583.28,4070 3731,4070 v1(3835.5,4174.5) ; v1@3905,4658 v1(4295,4658)
  Bottom Layer w8: U6.2@2670.31,3930.76 2670.31,4042.31 2705.5,4077.5 2879.87,4077.5 2943.37,4014 3023.63,4014 3162.63,3875 3390,3875 v1(3400,3885) ; v1(3835.5,4174.5) 3883,4222 3883,4642 v1@3895.49,4654.49 ; v1@4309,4658 4366,4658 4384.5,4676.5 4384.5,4709.22 4366,4727.72 4366,4830.28 4407,4871.28 4407,4969.75 4435.25,4998 4533,4998 4557,5022 4557,5024.88 4570,5037.88 4570,5130 4564.2,5135.8 U2.13@4508.8,5135.8
  other v1: 3901,4660
SPI_SEL_SD: J7.2 U2.10 | length 2750.2
  Top Layer w8: J7.2@2811.02,4401.49 v1(2868.51,4401.49) ; v1(3564,4317) 3701,4454 3701,4609.72 3736.78,4645.5 3833.5,4645.5 3885,4697 v1(4346,4697)
  Bottom Layer w8: v1(2868.51,4401.49) 2915,4355 2915,4158.51 2992.51,4081 3054.25,4081 3140.25,3995 3405,3995 3522,4112 3522,4275 v1(3564,4317) ; v1@4346,4706 4346,4954 4451.02,5059.02 U2.10@4508.8,5059.02
SW_BLUE: R46.1 SW4.3 U1.59 | length 1946.1
  Top Layer w8: SW4.3@4660,3044 R46.1@4720.24,2983.76 ; SW4.3@4666,3044 4716,3044 4740,3068 4740,3230 v1(4780,3270)
  Bottom Layer w8: v1(4780,3270) 4851.35,3270 5111,3529.65 5111,3689.63 5224.9,3803.52 5224.9,4012.48 5207,4030.37 5207,4309.9 5117.16,4399.74 U1.59@4959.23,4399.74
SW_GREEN: R45.1 SW3.3 U1.60 | length 2895.9
  Top Layer w8: SW3.3@3910,3047 v1(3910,3093) ; SW3.3@3911,3047 3958,3047 3971.47,3033.53 R45.1@3971.47,2981 ; v1@4242,3508 4409.37,3508 4433.37,3484 4648,3484 4690,3442 v1(4690,3420)
  Bottom Layer w8: v1@3909.5,3093.5 3960,3144 4171,3144 4270,3243 4270,3490 v1@4252,3508 ; v1(4690,3420) 4978.72,3420 5095,3536.28 5095,3734 5208,3847 5208,4006.75 5191,4023.75 5191,4302 5110.16,4382.84 5011.91,4382.84 5009.12,4380.06 U1.60@4959.23,4380.06
  other v1: 4240,3510
SW_RED: R44.1 SW2.3 T_SW_R1.1 U1.61 | length 4121.1
  Top Layer w8: SW2.3@3157,3041 R44.1@3210.47,2987.53 ; SW2.3@3160,3044 v1(3160,3091) ; v1@3161,3092 3182,3113 v1@3296,3113 ; v1@4185,2974 v1(4566,2974) ; v1(5046,3617) 5108,3555 5108,3267 5119,3256 v1(5119,3122) T_SW_R1.1@5163,3122
  Bottom Layer w8: v1@3295,3109 3295,3011 3411,2895 3593.28,2895 3617.78,2870.5 3642.22,2870.5 3666.72,2895 4003,2895 4083,2975 v1(4185,2975) ; v1(4566,2974) 4748.5,2791.5 4806.5,2791.5 4830,2815 4830,2886.6 5066.4,3123 v1@5119,3123 ; U1.61@4959.23,4360.37 5012.06,4360.37 5018.53,4366.84 5103.53,4366.84 5175,4295.37 5175,4017.12 5192,4000.12 5192,3887.75 5030,3725.75 5030,3633 v1(5046,3617)
  other v1: 3296,3112
USB_CTS: U1.22 U3.11 | length 2182.4
  Top Layer w8: v1@4162.5,3887.5 4172.5,3887.5 4225,3835 4260,3835 4305,3790 v1(4305,3715)
  Bottom Layer w8: U3.11@4079.57,2774.45 4079.57,2823.57 4095,2839 4161.37,2839 4353,3030.63 4353,3644.63 4305,3692.63 v1(4305,3715) ; v1(4165,3890) 4196,3921 4196,4244 4140,4300 4140,4370 4200,4430 4200,4464.28 4233.89,4498.17 U1.22@4362.77,4498.17
USBDM: J3.2 U3.16 | length 766.4
  Top Layer w8: v1@3635,2251 J3.2@3654.07,2340.96
  Bottom Layer w8: v1(3632,2248) 3632,2322 3700,2390 ; 3701,2391 4062.37,2391 4130.75,2459.38 U3.16@4130.75,2505.55
USBDP: J3.3 U3.15 | length 722.5
  Top Layer w8: v1@3671,2269 J3.3@3685,2335
  Bottom Layer w8: v1@3674,2262 3674,2341.37 3707.63,2375 4069,2375 4156.34,2462.34 U3.15@4156.34,2505.55
  other v1: 3677,2261
VBAT: D2.1 J4.21 J10.9 J10.11 R51.2 T_VBAT1.1 U8.6 | length 8126.9
  Top Layer w8: D2.1@4334.47,2604 4316,2604 4305,2615 4305,2855 4325,2875 4400,2875 4413.5,2888.5 4551.5,2888.5 v1(4645,2795) ; T_VBAT1.1@4871,5255 4871,5129.5 4877.22,5129.5 4894.5,5112.22 4894.5,5105.5 4895,5105 4895,5060
  Top Layer w15: v1(2815,4565) 2850,4530 2925,4530 v1(2945,4510) ; v1(3410,5450) 3545,5585 v1(4175,5585) ; v1(4200,5427) 4567,5060 4895,5060 v1@5238,5060 ; v1(5503,4741) 5503,4586 5675.5,4413.5 5675.5,4270 ; J10.9@5515.02,4270 5675.5,4270 ; v1(5740,4240) 5710,4270 5675.5,4270
  Top Layer w20: J10.9@5515.02,4270 J10.11@5515.02,4320
  Bottom Layer w8: v1(4645,2795) 4664.5,2775.5 4813.13,2775.5 4846,2808.37 4846,2879.97 5036.53,3070.5 5168.78,3070.5 5278.28,3180 5395,3180 5590,3375 5665,3375 5761.5,3471.5 5761.5,3723.22 5740,3744.72 v1(5740,4240)
  Bottom Layer w15: v1(2815,4565) 2785,4595 2785,4890.05 3249.95,5355 3315,5355 v1(3410,5450) ; v1(2945,4510) R51.2@2995.47,4510 ; U8.6@2977.2,4439.57 2977.2,4481.73 R51.2@3000.47,4505 ; v1(4175,5585) 4202,5558 v1@4202,5429 ; v1@5238.04,5057 5261,5058 5280,5039 5280,4961.82 5397.82,4844 ; 5398.67,4844 5420.67,4822 5458,4822 5503,4777 v1(5503,4741)
  Bottom Layer w20: J4.21@4200,5350.02 v1(4200,5427)
  other v1: 5238,5058
VDD25: C3.2 C4.2 U1.7 U1.14 U1.38 U1.62 U1.88 | length 1963.2
  Top Layer w8: v1(4449,4340) 4495,4340 4511,4356 v1@4764,4356
  Bottom Layer w8: C3.2@4278.31,4340.69 v1@4446.69,4340.69 ; U1.7@4362.77,4202.89 4427.17,4202.89 4430.78,4206.5 4455.5,4206.5 4537,4288 4537,4373 4584.5,4420.5 4661,4420.5 ; U1.88@4661,4022.77 4661,4122.33 4636,4147.33 4636,4296.44 4661,4321.44 4661,4420.5 ; 4661,4464 U1.38@4661,4619.23 ; 4661.5,4463.5 4756,4369 v1@4756,4359 ; 4704,4420.5 4661,4420.5 ; v1@4767,4361 4835,4361 4855.31,4340.69 C4.2@5033.31,4340.69
  other v1: 4767,4359
VDD_AUDIO: C35.1 C36.2 L5.1 U7.38 U7.43 U7.45 | length 651
  Bottom Layer w8: U7.45@3248.79,4473.57 3248.79,4518.79 3288.16,4558.16 ; C36.2@3288.16,4395.15 U7.43@3288.16,4473.57 3288.16,4558.16 ; C35.1@3498,4422 3402.68,4422 3386.58,4438.09 3386.58,4513.42 3359.5,4540.5 3359.5,4557.22 3339.88,4576.84 3306.84,4576.84 3288.16,4558.16 ; C35.1@3505,4422.44 L5.1@3556.44,4422.44
pads on no net: D10.1 D10.2 D11.1 D11.2 D12.1 D12.2 D13.1 D13.2 J1.7 J4.c1 J4.c2 J7. J7.1 J7.8 J8.1 J9.1 J10.c1 J10.c2 SW1.1 SW1.4 SW2.1 SW2.4 SW3.1 SW3.4 SW4.1 SW4.4 U1.16 U1.17 U1.37 U1.40 U1.43 U1.46 U1.51 U1.52 U1.53 U1.55 U2.15 U3.2 U3.3 U3.6 U3.8 U3.9 U3.10 U3.12 U3.13 U3.14 U3.24 U3.27 U3.28 U4.9 U5.12 U5.13 U5.28 U5.29 U7.15 U7.27 U7.48 U9.4 U9.5

## Polygon pours and split planes (outlines as drawn)
GND on Top Layer "Gnd" (solid, pour order 8): 3810,3170 3810,3349 3837,3376 3837,3640 3306,3640 3307,3639 3307,3385 3385,3385 3450,3335 3450,3210 3492,3170
GND on Top Layer "Top Layer-GND" (solid, pour order 12): 3550,4595 3550,5135 3370,5315 3135,5315 3095,5275 3095,5230 2900,5035 2825,5035 2790,5000 2790,4675 2825,4640 2915,4640 2915,4760 3030,4760 3070,4720 3070,4595
GND on Top Layer "PowerSupplyGnd" (solid, pour order 14): 4779,4899 5142,4898 5142,4616 5111,4585 4835,4585 4835,4652 4779,4708
GND on Top Layer "Top Layer-GND" (solid, pour order 13): 3085,4075 3450,4075 3500,4125 3500,4325 3550,4375 3575,4375 3600,4400 3600,4575 3059.53,4575 3060,4715 3025,4750 2925,4750 2925,4235
GND on Top Layer "Top Layer-GND" (solid, pour order 11): 2520,3205 2950,3205 3065,3320 3065,4005 2375,4005 2375,3550
GND on Bottom Layer "Gnd" (solid, pour order 10): 3065,3205 3065,3660 2975,3660 2955,3680 2690,3680 2630,3740 2455,3740 2420,3705 2375,3705 2375,3550 2520,3205

## Other copper
Top Layer:
  region net 3.3V: 4633.09,3339.88 4625,3334 4654.39,3293.55 4662.48,3299.43
  region net 3.3V: 4925,3304 4916.91,3309.88 4887.52,3269.43 4895.61,3263.55
  region net 3.3V: 4502.45,3083.55 4505.54,3074.04 4553.09,3089.49 4550,3099
  region net 3.3V: 4974.46,3014.04 4977.55,3023.55 4930,3039 4926.91,3029.49
  rectangle net 3.3V: 4715,2874 4725,2924
  region net 3.3V: 3133.09,3339.88 3125,3334 3154.39,3293.55 3162.48,3299.43
  region net 3.3V: 3425,3304 3416.91,3309.88 3387.52,3269.43 3395.61,3263.55
  region net 3.3V: 3474.46,3014.04 3477.55,3023.55 3430,3039 3426.91,3029.49
  region net 3.3V: 3005.45,3056.55 3008.54,3047.04 3056.09,3062.49 3053,3072
  rectangle net 3.3V: 3215,2874 3225,2924
  region net 3.3V: 3752.45,3086.55 3755.54,3077.04 3803.09,3092.49 3800,3102
  region net 3.3V: 3883.09,3342.88 3875,3337 3904.39,3296.55 3912.48,3302.43
  region net 3.3V: 4175,3307 4166.91,3312.88 4137.52,3272.43 4145.61,3266.55
  region net 3.3V: 4224.46,3017.04 4227.55,3026.55 4180,3042 4176.91,3032.49

## Silkscreen, mask and mechanical layers (free items; w line width, h text height)
Top Overlay:
  drawing of 36 lines, arcs and shapes, not listed
  text "T0" at 3655,5855 h30
  text "GND" at 4110,5715 h45
  text "3.3V" at 4325,5715 h45
  text "IR0" at 3070,5500 h30
  text "GND" at 4710,5445 h40
  text "3.3V" at 4675,5345 h40
  text "VBAT" at 4660,5230 h45
  text "FL" at 2685,5005 h30
  text "FR" at 5415,4900 h80
  text "FL" at 2475,4895 h80
  text "FR" at 5650,4875 h30
  text "Expansion" at 5615,4495 h60 r270
  text "PWM0A" at 4480,4490 h45
  text "QEI0A" at 3875,4425 h45
  text "QEI0B" at 4135,4425 h45
  text "PWM0B" at 4480,4420 h45
  text "IR" at 3965,4285 h60
  text "Beacon" at 3830,4210 h60
  text "Micro SD" at 2405,4075 h60 r90
  text "r-one-v12.1" at 4190,3760 h41
  text "JTAG" at 5305,3720 h80 r335
  text "R" at 3200,3400 h180
  text "G" at 3940,3400 h180
  text "B" at 4700,3400 h180
  text "SW_R" at 5050,3155 h30
  text "RST" at 5410,3140 h50
  text "BL" at 2455,3030 h80
  text "BR" at 5410,3025 h80
  text "RX" at 5340,2980 h50 r90
  text "TX" at 5265,2935 h50 r90
  text "RX" at 3725,2590 h50 r79.1
  text "TX" at 3790,2575 h50 r79.1
  text "IR4" at 4825,2495 h30
  text "T4" at 4225,2240 h30
Bottom Overlay:
  text "8962-CPU" at 4381,4603 h45
Mechanical 1:
  lines w5: 2000,4000 6000,4000 ; 4000,2000 4000,6000
  lines w10: 2790,4449 2790,4489 ; 2818.63,4361.63 2842.24,4361.63
Mechanical 2:
  lines w8: 2460.61,2790.49 cw(c4000,4000) 2460.99,5209.99 2580,5210 2580,5348 cw(c4000,4000) 5420,5348 5420,5210 5539,5210 ; 2461,2790 2580,2790 2580,2652 ccw(c4000,4000) 5420,2652 5420,2790 5539,2790 ; 5539.56,2790.35 ccw(c4000,4000) 5539.56,5209.65